# Altium PCB msr50.PcbDoc (part 2 of 8)
Units mil, origin at the board's own origin, x right, y up, seen from the top; angles counter-clockwise.
Board outline 3925 x 3925 mil, 2 copper layers (TopLayer, BottomLayer); 109 components, 122 nets, 846 pads, 52 vias.
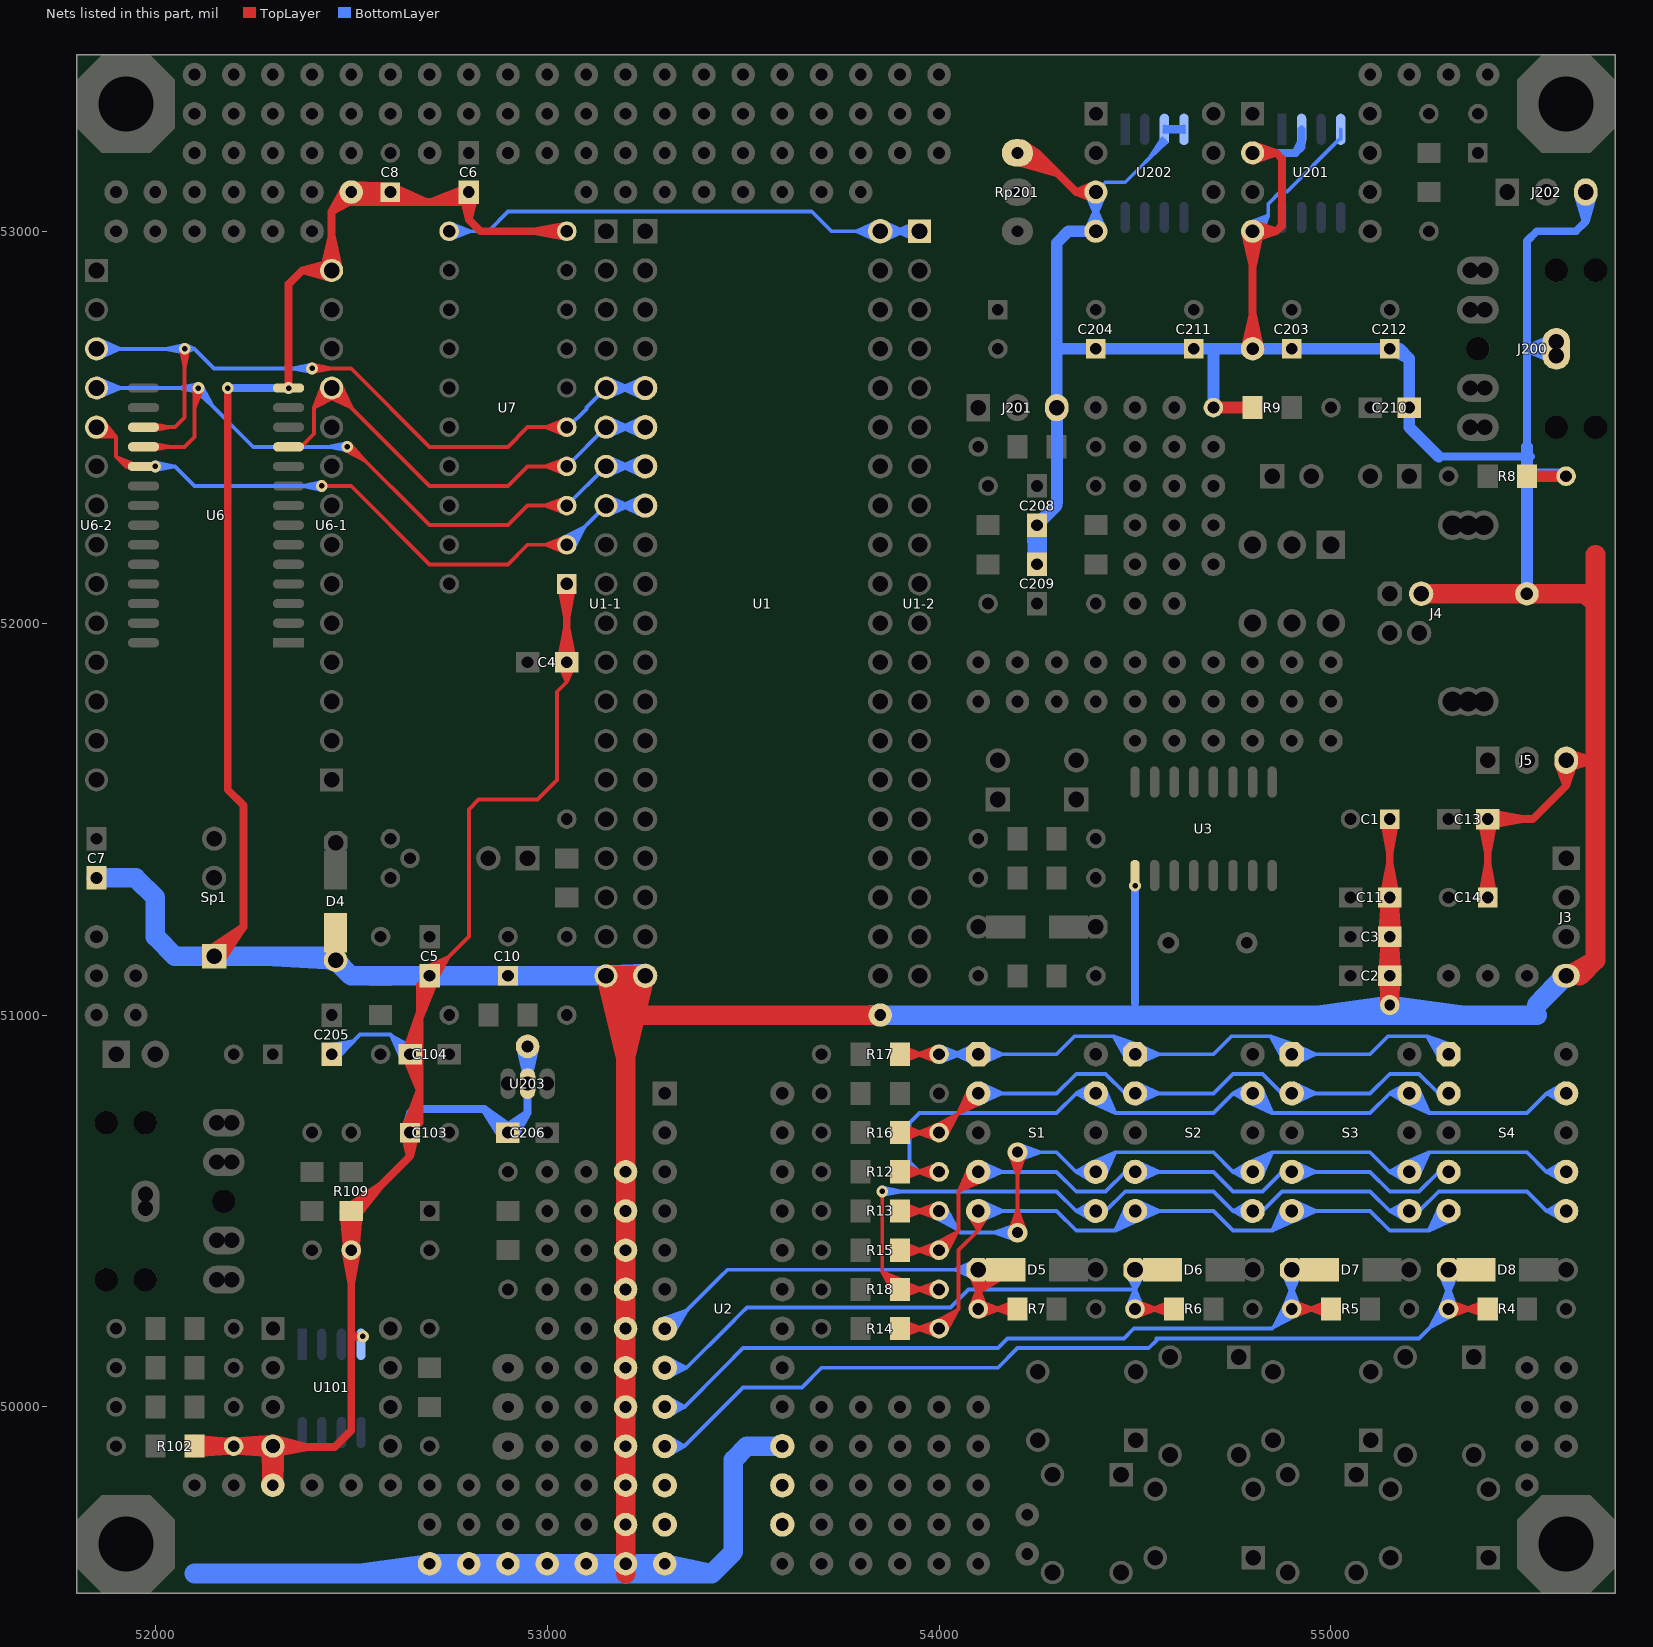
[diagram p2: the nets of this part, all layers, seen from the top]

## Via types
v1: diameter 30, hole 14, TopLayer to BottomLayer, 40 vias
v2: diameter 50, hole 28, TopLayer to BottomLayer, 12 vias

## Nets (pads, with @x,y where several pads share a name; then routed paths per layer and width w, separated by ;. In a path a pad name is that pad's centre, name@x,y a point inside that pad or via, vN(x,y) a via of type N, cw(c..) or ccw(c..) an arc to the next point about the centre after c; other vN are vias at no path point) (continued)
AD4: U1-1.5 U1.5 U6-2.3 U6.17 U7.5 | length 3585.7
  TopLayer w10: U6.17@51969.92,52500 52050,52500 52075,52525 v1(52075,52700) ; U6.17@51998.11,52500 52039.92,52500 ; U6.17@51998.67,52493.21 52039.92,52500 ; U6.17@51998.67,52506.79 52039.92,52500 ; v1@52065.05,52698.98 52075,52651 v1@52084.95,52698.98 ; v1@52395,52650 52500,52650 52700,52450 52900,52450 52950,52500 U7.5@53050,52500 ; v1(52400,52650) 52449,52650 ; v1@52401.02,52640.05 52449,52650 ; v1@52401.02,52659.95 52449,52650 ; U7.5@53046.36,52480.33 52995,52500 ; U7.5@53046.36,52519.67 52995,52500 ; U7.5@53049.09,52490.04 52995,52500 ; U7.5@53049.09,52509.96 52995,52500
  BottomLayer w10: U6-2.3@51850,52700 52100,52700 ; U6-2.3@51851.77,52685.58 51909.53,52700 ; U6-2.3@51851.77,52714.42 51909.53,52700 ; U6-2.3@51855.05,52676 51909.53,52700 ; U6-2.3@51855.05,52724 51909.53,52700 ; v1@52073.98,52690.05 52026,52700 v1@52073.98,52709.95 ; v1@52077,52690.2 52100,52700 ; v1@52077,52709.8 52100,52700 ; v1@52395,52650 52150,52650 52100,52700 ; v1@52398.98,52640.05 52351,52650 ; v1@52398.98,52659.95 52351,52650 ; v1(52400,52650) 52351,52650 ; U7.5@53050,52500 53053.28,52500 53100,52546.72 53100,52550 U1-1.5@53150,52600 U1.5@53250,52600 ; U1-1.5@53151.77,52585.58 53209.53,52600 ; U1-1.5@53151.77,52614.42 53209.53,52600 ; U1-1.5@53155.05,52576 53209.53,52600 ; U1-1.5@53155.05,52624 53209.53,52600 ; U1.5@53244.46,52574.6 53189,52600 ; U1.5@53244.46,52625.4 53189,52600 ; U1.5@53247.9,52584.14 53189,52600 ; U1.5@53247.9,52615.86 53189,52600 ; U1.5@53249.7,52594.01 53189,52600 ; U1.5@53249.7,52605.99 53189,52600
AD5: U1-1.6 U1.6 U6-1.11 U6.11 U7.4 | length 2627.3
  TopLayer w10: U6.11@52340,52450 52371.72,52450 52405,52483.28 52405,52550 ; U6-1.11@52429.08,52612.81 52405,52550 ; U6-1.11@52435.88,52579.95 52500.74,52549.26 ; U6-1.11@52438.22,52608.5 52405,52550 ; U6-1.11@52440.82,52588.74 52500.74,52549.26 ; U6-1.11@52459.69,52589.17 52405,52550 ; U6-1.11@52461.26,52609.18 52500.74,52549.26 ; U6-1.11@52464.93,52580.54 52405,52550 ; U6-1.11@52470.05,52614.12 52500.74,52549.26 ; U7.4@53046.36,52380.33 52995,52400 ; U7.4@53046.36,52419.67 52995,52400 ; U7.4@53049.09,52390.04 52995,52400 ; U7.4@53049.09,52409.96 52995,52400 ; U7.4@53050,52400 52950,52400 52900,52350 52700,52350 U6-1.11@52450,52600 ; 52405,52550 U6-1.11@52450,52600 ; 52405,52550 52450,52595 U6-1.11@52450,52600
  BottomLayer w10: U7.4@53050,52400 U1-1.6@53150,52500 U1.6@53250,52500 ; U1-1.6@53151.77,52485.58 53209.53,52500 ; U1-1.6@53151.77,52514.42 53209.53,52500 ; U1-1.6@53155.05,52476 53209.53,52500 ; U1-1.6@53155.05,52524 53209.53,52500 ; U1.6@53244.46,52474.6 53189,52500 ; U1.6@53244.46,52525.4 53189,52500 ; U1.6@53247.9,52484.14 53189,52500 ; U1.6@53247.9,52515.86 53189,52500 ; U1.6@53249.7,52494.01 53189,52500 ; U1.6@53249.7,52505.99 53189,52500
AD6: U1-1.7 U1.7 U6-2.4 U6.18 U7.3 | length 3808.6
  TopLayer w10: U6.18@51969.92,52450 52075,52450 52100,52475 v1@52100,52605 ; U6.18@51998.11,52450 52039.92,52450 ; U6.18@51998.67,52443.21 52039.92,52450 ; U6.18@51998.67,52456.79 52039.92,52450 ; v1@52100.05,52600.98 52100,52549.55 ; v1(52110,52600) 52100,52549.55 ; v1@52119.57,52597.11 52100,52549.55 ; v1@52484.55,52441.61 52535.5,52414.5 ; v1@52496.81,52457.32 52535.5,52414.5 ; U7.3@53046.36,52280.33 52995,52300 ; U7.3@53046.36,52319.67 52995,52300 ; U7.3@53049.09,52290.04 52995,52300 ; U7.3@53049.09,52309.96 52995,52300 ; U7.3@53050,52300 52950,52300 52900,52250 52700,52250 52500,52450 v1(52490,52450) 52535.5,52414.5
  BottomLayer w10: U6-2.4@51850,52600 52100,52600 52250,52450 v1(52490,52450) ; U6-2.4@51851.77,52585.58 51909.53,52600 ; U6-2.4@51851.77,52614.42 51909.53,52600 ; U6-2.4@51855.05,52576 51909.53,52600 ; U6-2.4@51855.05,52624 51909.53,52600 ; v1@52102.68,52593.19 52144.98,52555.02 ; v1@52108.98,52590.05 52061,52600 ; v1@52108.98,52609.95 52061,52600 ; v1@52118.4,52605.42 52144.98,52555.02 ; v1@52488.98,52440.05 52441,52450 v1@52488.98,52459.95 ; U7.3@53050,52300 U1-1.7@53150,52400 U1.7@53250,52400 ; U1-1.7@53151.77,52385.58 53209.53,52400 ; U1-1.7@53151.77,52414.42 53209.53,52400 ; U1-1.7@53155.05,52376 53209.53,52400 ; U1-1.7@53155.05,52424 53209.53,52400 ; U1.7@53244.46,52374.6 53189,52400 ; U1.7@53244.46,52425.4 53189,52400 ; U1.7@53247.9,52384.14 53189,52400 ; U1.7@53247.9,52415.86 53189,52400 ; U1.7@53249.7,52394.01 53189,52400 ; U1.7@53249.7,52405.99 53189,52400 ; 52061,52600 v1(52110,52600) 52144.98,52555.02
AD7: U1-1.8 U1.8 U6-2.5 U6.19 U7.2 | length 3453.3
  TopLayer w10: U6-2.5@51844.11,52476.19 51900,52475 ; U6-2.5@51845.25,52486.27 51900,52475 ; U6-2.5@51858.13,52512.04 51900,52475 ; U6-2.5@51865.51,52519 51900,52475 ; U6.19@51937.9,52394.37 51902.29,52422.71 ; U6.19@51944.68,52406.14 51902.29,52422.71 ; U6.19@51969.92,52400 51925,52400 ; v1(52425,52350) 52500,52350 52700,52150 52900,52150 52950,52200 U7.2@53050,52200 ; U7.2@53046.36,52180.33 52995,52200 ; U7.2@53046.36,52219.67 52995,52200 ; U7.2@53049.09,52190.04 52995,52200 ; U7.2@53049.09,52209.96 52995,52200 ; 51900,52475 U6-2.5@51850,52500 51875,52500 51900,52475 ; 51900,52475 51900,52425 51925,52400 ; 51902.29,52422.71 U6.19@51941.73,52400 ; 51925,52400 U6.19@51941.73,52400 ; 51925,52400 51940.35,52406.67 51925,52400 ; 51925,52400 51940.35,52393.33 51925,52400 ; 51925,52400 U6.19@51941.73,52400
  BottomLayer w10: v1(52000,52400) 52050,52400 52100,52350 v1(52425,52350) 52376,52350 ; v1@52001.02,52390.05 52049,52400 v1@52001.02,52409.95 ; v1@52423.98,52340.05 52376,52350 ; v1@52423.98,52359.95 52376,52350 ; U7.2@53038.19,52216.14 53096.21,52246.21 ; U7.2@53043.49,52207.59 53096.21,52246.21 ; U7.2@53050,52200 U1-1.8@53150,52300 U1.8@53250,52300 ; U7.2@53057.59,52193.49 53096.21,52246.21 ; U7.2@53066.14,52188.19 53096.21,52246.21 ; U1-1.8@53151.77,52285.58 53209.53,52300 ; U1-1.8@53151.77,52314.42 53209.53,52300 ; U1-1.8@53155.05,52276 53209.53,52300 ; U1-1.8@53155.05,52324 53209.53,52300 ; U1.8@53244.46,52274.6 53189,52300 ; U1.8@53244.46,52325.4 53189,52300 ; U1.8@53247.9,52284.14 53189,52300 ; U1.8@53247.9,52315.86 53189,52300 ; U1.8@53249.7,52294.01 53189,52300 ; U1.8@53249.7,52305.99 53189,52300
ALE: U1-2.1 U1.40 U7.11 | length 2431.5
  BottomLayer w10: U7.11@52750,53000 52850,53000 52900,53050 53675,53050 53725,53000 U1.40@53850,53000 U1-2.1@53950,53000 ; U7.11@52750.91,52990.04 52805,53000 ; U7.11@52750.91,53009.96 52805,53000 ; U7.11@52753.64,52980.33 52805,53000 ; U7.11@52753.64,53019.67 52805,53000 ; U1.40@53844.46,52974.6 53789,53000 ; U1.40@53844.46,53025.4 53789,53000 ; U1.40@53847.9,52984.14 53789,53000 ; U1.40@53847.9,53015.86 53789,53000 ; U1.40@53849.7,52994.01 53789,53000 ; U1.40@53849.7,53005.99 53789,53000 ; U1.40@53850.3,52994.01 53911,53000 ; U1.40@53850.3,53005.99 53911,53000 ; U1.40@53852.1,52984.14 53911,53000 ; U1.40@53852.1,53015.86 53911,53000 ; U1.40@53855.54,52974.6 53911,53000 ; U1.40@53855.54,53025.4 53911,53000 ; U1-2.1@53944.95,52976 53890.47,53000 ; U1-2.1@53944.95,53024 53890.47,53000 ; U1-2.1@53948.23,52985.58 53890.47,53000 ; U1-2.1@53948.23,53014.42 53890.47,53000
B: R12.1 R12.3 S1.9 S2.9 S3.9 S4.9 | length 5851.6
  TopLayer w10: R12.3@53900,50600 R12.1@54000,50600 ; R12.3@53901.01,50589.46 53955.59,50600 ; R12.3@53901.01,50610.54 53955.59,50600 ; R12.3@53903.81,50579.77 53955.59,50600 ; R12.3@53903.81,50620.23 53955.59,50600 ; R12.1@53996.36,50580.33 53945,50600 ; R12.1@53996.36,50619.67 53945,50600 ; R12.1@53999.09,50590.04 53945,50600 ; R12.1@53999.09,50609.96 53945,50600
  BottomLayer w10: R12.1@53996,50580.4 53950,50600 ; R12.1@53996,50619.6 53950,50600 ; R12.1@53999,50590.05 53950,50600 ; R12.1@53999,50609.95 53950,50600 ; R12.1@54000,50600 53950,50600 ; S1.9@54385.31,50778.55 54450,50750 ; S1.9@54390.04,50787.48 54450,50750 ; S1.9@54393.24,50774.89 54350,50800 ; S1.9@54393.24,50825.11 54350,50800 ; S1.9@54395.94,50795.58 54450,50750 ; S1.9@54397.44,50784.21 54350,50800 ; S1.9@54397.44,50815.79 54350,50800 ; S1.9@54399.64,50794.01 54350,50800 ; S1.9@54399.64,50805.99 54350,50800 ; S1.9@54404.42,50804.06 54450,50750 ; S1.9@54412.52,50809.96 54450,50750 ; S1.9@54421.45,50814.69 54450,50750 ; S2.9@54785.31,50778.55 54850,50750 ; S2.9@54790.04,50787.48 54850,50750 ; S2.9@54793.24,50774.89 54750,50800 ; S2.9@54793.24,50825.11 54750,50800 ; S2.9@54795.94,50795.58 54850,50750 ; S2.9@54797.44,50784.21 54750,50800 ; S2.9@54797.44,50815.79 54750,50800 ; S2.9@54799.64,50794.01 54750,50800 ; S2.9@54799.64,50805.99 54750,50800 ; S2.9@54804.42,50804.06 54850,50750 ; S2.9@54812.52,50809.96 54850,50750 ; S2.9@54821.45,50814.69 54850,50750 ; S3.9@55185.31,50778.55 55250,50750 ; S3.9@55190.04,50787.48 55250,50750 ; S3.9@55195.94,50795.58 55250,50750 ; S3.9@55204.42,50804.06 55250,50750 ; S3.9@55212.52,50809.96 55250,50750 ; S3.9@55221.45,50814.69 55250,50750 ; S4.9@55593.24,50774.89 55550,50800 ; S4.9@55593.24,50825.11 55550,50800 ; S4.9@55597.44,50784.21 55550,50800 ; S4.9@55597.44,50815.79 55550,50800 ; S4.9@55599.64,50794.01 55550,50800 ; S4.9@55599.64,50805.99 55550,50800 ; S4.9@55600,50800 55550,50800 ; 53950,50600 53925,50625 53925,50725 53950,50750 54300,50750 54350,50800 ; 54350,50800 S1.9@54400,50800 ; 54350,50800 S1.9@54400,50800 ; S1.9@54400,50800 54450,50750 ; 54450,50750 54700,50750 54750,50800 ; 54750,50800 S2.9@54800,50800 ; 54750,50800 S2.9@54800,50800 ; S2.9@54800,50800 54850,50750 ; 54850,50750 55100,50750 ; 55100,50750 55150,50800 ; 55100,50750 55150,50800 ; 55150,50800 S3.9@55200,50800 ; 55150,50800 55199.64,50805.99 55150,50800 ; 55150,50800 55199.64,50794.01 55150,50800 ; 55150,50800 55197.44,50815.79 55150,50800 ; 55150,50800 55197.44,50784.21 55150,50800 ; 55150,50800 55193.24,50825.11 55150,50800 ; 55150,50800 55193.24,50774.89 55150,50800 ; 55150,50800 S3.9@55200,50800 ; 55150,50800 S3.9@55200,50800 ; 55150,50800 S3.9@55200,50800 ; S3.9@55200,50800 55250,50750 ; 55250,50750 55500,50750 55550,50800
C: R13.1 R13.3 S1.7 S2.7 S3.7 S4.7 | length 6814
  TopLayer w10: R13.3@53900,50500 R13.1@54000,50500 ; R13.3@53901.01,50489.46 53955.59,50500 ; R13.3@53901.01,50510.54 53955.59,50500 ; R13.3@53903.81,50479.77 53955.59,50500 ; R13.3@53903.81,50520.23 53955.59,50500 ; R13.1@53996.36,50480.33 53945,50500 ; R13.1@53996.36,50519.67 53945,50500 ; R13.1@53999.09,50490.04 53945,50500 ; R13.1@53999.09,50509.96 53945,50500 ; v2@54180.29,50448.39 54200,50504 ; v2@54180.29,50646.61 54200,50591 ; v2@54190.04,50445.85 54200,50504 ; v2@54190.04,50649.15 54200,50591 ; v2(54200,50445) v2(54200,50650) ; v2@54209.96,50445.85 54200,50504 ; v2@54209.96,50649.15 54200,50591 ; v2@54219.71,50448.39 54200,50504 ; v2@54219.71,50646.61 54200,50591
  BottomLayer w10: R13.1@53988.19,50483.86 54046.21,50453.79 ; R13.1@53993.49,50492.41 54046.21,50453.79 ; R13.1@54000,50500 54055,50445 v2(54200,50445) ; R13.1@54007.59,50506.51 54046.21,50453.79 ; R13.1@54016.14,50511.81 54046.21,50453.79 ; v2@54196.61,50425.29 54141,50445 ; v2@54196.61,50464.71 54141,50445 ; v2@54199.15,50435.04 54141,50445 ; v2@54199.15,50454.96 54141,50445 ; v2(54200,50650) 54300,50650 54350,50600 ; v2@54200.85,50640.04 54259,50650 ; v2@54200.85,50659.96 54259,50650 ; v2@54203.39,50630.29 54259,50650 ; v2@54203.39,50669.71 54259,50650 ; S1.7@54385.31,50621.45 54450,50650 ; S1.7@54390.04,50612.52 54450,50650 ; S1.7@54393.24,50574.89 54350,50600 ; S1.7@54393.24,50625.11 54350,50600 ; S1.7@54395.94,50604.42 54450,50650 ; S1.7@54397.44,50584.21 54350,50600 ; S1.7@54397.44,50615.79 54350,50600 ; S1.7@54399.64,50594.01 54350,50600 ; S1.7@54399.64,50605.99 54350,50600 ; S1.7@54404.42,50595.94 54450,50650 ; S1.7@54412.52,50590.04 54450,50650 ; S1.7@54421.45,50585.31 54450,50650 ; S2.7@54785.31,50621.45 54850,50650 ; S2.7@54790.04,50612.52 54850,50650 ; S2.7@54793.24,50574.89 54750,50600 ; S2.7@54793.24,50625.11 54750,50600 ; S2.7@54795.94,50604.42 54850,50650 ; S2.7@54797.44,50584.21 54750,50600 ; S2.7@54797.44,50615.79 54750,50600 ; S2.7@54799.64,50594.01 54750,50600 ; S2.7@54799.64,50605.99 54750,50600 ; S2.7@54804.42,50595.94 54850,50650 ; S2.7@54812.52,50590.04 54850,50650 ; S2.7@54821.45,50585.31 54850,50650 ; S3.7@55185.31,50621.45 55250,50650 ; S3.7@55190.04,50612.52 55250,50650 ; S3.7@55195.94,50604.42 55250,50650 ; S3.7@55204.42,50595.94 55250,50650 ; S3.7@55212.52,50590.04 55250,50650 ; S3.7@55221.45,50585.31 55250,50650 ; S4.7@55593.24,50574.89 55550,50600 ; S4.7@55593.24,50625.11 55550,50600 ; S4.7@55597.44,50584.21 55550,50600 ; S4.7@55597.44,50615.79 55550,50600 ; S4.7@55599.64,50594.01 55550,50600 ; S4.7@55599.64,50605.99 55550,50600 ; S4.7@55600,50600 55550,50600 ; 54350,50600 S1.7@54400,50600 ; 54350,50600 S1.7@54400,50600 ; S1.7@54400,50600 54450,50650 ; 54450,50650 54700,50650 54750,50600 ; 54750,50600 S2.7@54800,50600 ; 54750,50600 S2.7@54800,50600 ; S2.7@54800,50600 54850,50650 ; 54850,50650 55100,50650 ; 55100,50650 55150,50600 ; 55100,50650 55150,50600 ; 55150,50600 S3.7@55200,50600 ; 55150,50600 55199.64,50605.99 55150,50600 ; 55150,50600 55199.64,50594.01 55150,50600 ; 55150,50600 55197.44,50615.79 55150,50600 ; 55150,50600 55197.44,50584.21 55150,50600 ; 55150,50600 55193.24,50625.11 55150,50600 ; 55150,50600 55193.24,50574.89 55150,50600 ; 55150,50600 S3.7@55200,50600 ; 55150,50600 S3.7@55200,50600 ; 55150,50600 S3.7@55200,50600 ; S3.7@55200,50600 55250,50650 ; 55250,50650 55500,50650 55550,50600
D: R14.1 R14.3 S1.5 S2.5 S3.5 S4.5 | length 5352.4
  TopLayer w10: R14.3@53900,50200 R14.1@54000,50200 54050,50250 54050,50400 54100,50450 ; R14.3@53901.01,50189.46 53955.59,50200 ; R14.3@53901.01,50210.54 53955.59,50200 ; R14.3@53903.81,50179.77 53955.59,50200 ; R14.3@53903.81,50220.23 53955.59,50200 ; R14.1@53988.19,50216.14 54046.21,50246.21 ; R14.1@53993.49,50207.59 54046.21,50246.21 ; R14.1@53996.36,50180.33 53945,50200 ; R14.1@53996.36,50219.67 53945,50200 ; R14.1@53999.09,50190.04 53945,50200 ; R14.1@53999.09,50209.96 53945,50200 ; R14.1@54007.59,50193.49 54046.21,50246.21 ; R14.1@54016.14,50188.19 54046.21,50246.21 ; S1.5@54074.89,50493.24 54100,50450 ; S1.5@54084.21,50497.44 54100,50450 ; S1.5@54094.01,50499.64 54100,50450 ; S1.5@54100,50500 54100,50450 ; S1.5@54105.99,50499.64 54100,50450 ; S1.5@54115.79,50497.44 54100,50450 ; S1.5@54125.11,50493.24 54100,50450
  BottomLayer w10: S1.5@54100,50500 54300,50500 54350,50450 54450,50450 ; S1.5@54100.3,50494.01 54161,50500 ; S1.5@54100.3,50505.99 54161,50500 ; S1.5@54102.1,50484.14 54161,50500 ; S1.5@54102.1,50515.86 54161,50500 ; S1.5@54105.54,50474.6 54161,50500 ; S1.5@54105.54,50525.4 54161,50500 ; S2.5@54478.55,50514.69 54450,50450 ; S2.5@54487.48,50509.96 54450,50450 ; S2.5@54495.58,50504.06 54450,50450 ; S2.5@54500.3,50494.01 54561,50500 ; S2.5@54500.3,50505.99 54561,50500 ; S2.5@54502.1,50484.14 54561,50500 ; S2.5@54502.1,50515.86 54561,50500 ; S2.5@54504.06,50495.58 54450,50450 ; S2.5@54505.54,50474.6 54561,50500 ; S2.5@54505.54,50525.4 54561,50500 ; S2.5@54509.96,50487.48 54450,50450 ; S2.5@54514.69,50478.55 54450,50450 ; S3.5@54878.55,50514.69 54850,50450 ; S3.5@54887.48,50509.96 54850,50450 ; S3.5@54895.58,50504.06 54850,50450 ; S3.5@54900.3,50494.01 54961,50500 ; S3.5@54900.3,50505.99 54961,50500 ; S3.5@54902.1,50484.14 54961,50500 ; S3.5@54902.1,50515.86 54961,50500 ; S3.5@54904.06,50495.58 54850,50450 ; S3.5@54905.54,50474.6 54961,50500 ; S3.5@54905.54,50525.4 54961,50500 ; S3.5@54909.96,50487.48 54850,50450 ; S3.5@54914.69,50478.55 54850,50450 ; S4.5@55278.55,50514.69 55250,50450 ; S4.5@55287.48,50509.96 55250,50450 ; S4.5@55295.58,50504.06 55250,50450 ; S4.5@55304.06,50495.58 55250,50450 ; S4.5@55309.96,50487.48 55250,50450 ; S4.5@55314.69,50478.55 55250,50450 ; 54450,50450 S2.5@54500,50500 ; 54450,50450 S2.5@54500,50500 ; S2.5@54500,50500 54700,50500 54750,50450 54850,50450 ; 54850,50450 S3.5@54900,50500 ; 54850,50450 S3.5@54900,50500 ; S3.5@54900,50500 55100,50500 55150,50450 55250,50450 ; 55250,50450 S4.5@55300,50500 55250,50450
DIG0: U2.14
DIG1: U2.13
DIG2: U2.12
DIG3: U2.11
DIG4: D8.1 D8.3 R4.2 R4.4 U2.10 | length 3811.7
  TopLayer w10: R4.2@55300,50250 R4.4@55400,50250 ; R4.2@55300.91,50240.04 55355,50250 ; R4.2@55300.91,50259.96 55355,50250 ; R4.2@55303.64,50230.33 55355,50250 ; R4.2@55303.64,50269.67 55355,50250 ; R4.4@55396.19,50229.77 55344.41,50250 ; R4.4@55396.19,50270.23 55344.41,50250 ; R4.4@55398.99,50239.46 55344.41,50250 ; R4.4@55398.99,50260.54 55344.41,50250
  BottomLayer w10: U2.10@53300,49900 53350,49900 ; U2.10@53300.36,49894.01 53350,49900 ; U2.10@53300.36,49905.99 53350,49900 ; U2.10@53302.56,49884.21 53350,49900 ; U2.10@53302.56,49915.79 53350,49900 ; U2.10@53306.76,49874.89 53350,49900 ; U2.10@53306.76,49925.11 53350,49900 ; D8.1@55275.55,50344.79 55300,50290 ; R4.2@55280.33,50253.64 55300,50305 ; R4.2@55283.86,50261.81 55253.79,50203.79 ; D8.1@55285.12,50348.12 55300,50290 ; R4.2@55290.04,50250.91 55300,50305 ; R4.2@55292.41,50256.51 55253.79,50203.79 ; D8.1@55300,50350 R4.2@55300,50250 55225,50175 54555,50175 54555,50170 54535,50150 54200,50150 54150,50100 53700,50100 53650,50050 53500,50050 53350,49900 ; R4.2@55306.51,50242.41 55253.79,50203.79 ; R4.2@55309.96,50250.91 55300,50305 ; R4.2@55311.81,50233.86 55253.79,50203.79 ; D8.1@55314.88,50348.12 55300,50290 ; R4.2@55319.67,50253.64 55300,50305 ; D8.1@55324.45,50344.79 55300,50290
DIG5: D7.1 D7.3 R5.2 R5.4 U2.9 | length 3367.3
  TopLayer w10: R5.2@54900,50250 R5.4@55000,50250 ; R5.2@54900.91,50240.04 54955,50250 ; R5.2@54900.91,50259.96 54955,50250 ; R5.2@54903.64,50230.33 54955,50250 ; R5.2@54903.64,50269.67 54955,50250 ; R5.4@54996.19,50229.77 54944.41,50250 ; R5.4@54996.19,50270.23 54944.41,50250 ; R5.4@54998.99,50239.46 54944.41,50250 ; R5.4@54998.99,50260.54 54944.41,50250
  BottomLayer w10: U2.9@53300,50000 53350,50000 ; U2.9@53300.36,49994.01 53350,50000 ; U2.9@53300.36,50005.99 53350,50000 ; U2.9@53302.56,49984.21 53350,50000 ; U2.9@53302.56,50015.79 53350,50000 ; U2.9@53306.76,49974.89 53350,50000 ; U2.9@53306.76,50025.11 53350,50000 ; D7.1@54875.55,50344.79 54900,50290 ; R5.2@54880.33,50253.64 54900,50305 ; R5.2@54883.86,50261.81 54853.79,50203.79 ; D7.1@54885.12,50348.12 54900,50290 ; R5.2@54890.04,50250.91 54900,50305 ; R5.2@54892.41,50256.51 54853.79,50203.79 ; D7.1@54900,50350 R5.2@54900,50250 54850,50200 54496.72,50200 54471.72,50175 54175,50175 54150,50150 53725,50150 53500,50150 53450,50100 53350,50000 ; R5.2@54906.51,50242.41 54853.79,50203.79 ; R5.2@54909.96,50250.91 54900,50305 ; R5.2@54911.81,50233.86 54853.79,50203.79 ; D7.1@54914.88,50348.12 54900,50290 ; R5.2@54919.67,50253.64 54900,50305 ; D7.1@54924.45,50344.79 54900,50290
DIG6: D6.1 D6.3 R6.2 R6.4 U2.8 | length 2661.2
  TopLayer w10: R6.2@54500,50250 R6.4@54600,50250 ; R6.2@54500.91,50240.04 54555,50250 ; R6.2@54500.91,50259.96 54555,50250 ; R6.2@54503.64,50230.33 54555,50250 ; R6.2@54503.64,50269.67 54555,50250 ; R6.4@54596.19,50229.77 54544.41,50250 ; R6.4@54596.19,50270.23 54544.41,50250 ; R6.4@54598.99,50239.46 54544.41,50250 ; R6.4@54598.99,50260.54 54544.41,50250
  BottomLayer w10: U2.8@53300,50100 53356,50100 ; U2.8@53300.32,50094.01 53356,50100 ; U2.8@53300.32,50105.99 53356,50100 ; U2.8@53302.29,50084.16 53356,50100 ; U2.8@53302.29,50115.84 53356,50100 ; U2.8@53306.04,50074.71 53356,50100 ; U2.8@53306.04,50125.29 53356,50100 ; D6.1@54475.79,50343.75 54500,50300 ; R6.2@54480.4,50254 54500,50300 ; D6.1@54485.17,50347.75 54500,50300 ; R6.2@54490.05,50251 54500,50300 ; R6.2@54500,50250 54500,50300 ; D6.1@54500,50350 54500,50300 ; R6.2@54509.95,50251 54500,50300 ; D6.1@54514.83,50347.75 54500,50300 ; R6.2@54519.6,50254 54500,50300 ; D6.1@54524.21,50343.75 54500,50300 ; 53356,50100 53465,50209 53495,50239 53510,50254 53580.95,50254 54029,50254 54075,50300 54500,50300
DIG7: D5.1 D5.3 R7.2 R7.4 U2.7 | length 3103.2
  TopLayer w10: D5.1@54075.55,50344.79 54100,50290 ; R7.2@54080.33,50253.64 54100,50305 ; D5.1@54085.12,50348.12 54100,50290 ; R7.2@54090.04,50250.91 54100,50305 ; D5.1@54100,50350 R7.2@54100,50250 R7.4@54200,50250 ; R7.2@54100.91,50240.04 54155,50250 ; R7.2@54100.91,50259.96 54155,50250 ; R7.2@54103.64,50230.33 54155,50250 ; R7.2@54103.64,50269.67 54155,50250 ; R7.2@54109.96,50250.91 54100,50305 ; D5.1@54114.88,50348.12 54100,50290 ; R7.2@54119.67,50253.64 54100,50305 ; D5.1@54124.45,50344.79 54100,50290 ; D5.1@54128.45,50362.54 54101.33,50292.98 ; D5.3@54137.57,50358.25 54101.33,50292.98 ; D5.3@54149.53,50350 54101.33,50292.98 ; D5.3@54159.66,50339.59 54101.33,50292.98 ; D5.3@54165.4,50331.3 54101.33,50292.98 ; R7.4@54196.19,50229.77 54144.41,50250 ; R7.4@54196.19,50270.23 54144.41,50250 ; R7.4@54198.99,50239.46 54144.41,50250 ; R7.4@54198.99,50260.54 54144.41,50250
  BottomLayer w10: U2.7@53287.32,50222.7 53356.41,50246.41 ; U2.7@53291.25,50213.39 53356.41,50246.41 ; U2.7@53296.38,50204.79 53356.41,50246.41 ; U2.7@53304,50195.53 53356.41,50246.41 ; U2.7@53311.46,50188.83 53356.41,50246.41 ; U2.7@53319.83,50183.18 53356.41,50246.41 ; D5.1@54090,50360 D5.1@54100,50350 53460,50350 53440,50330 53310,50200 U2.7@53300,50200 53356.41,50246.41 ; D5.1@54094.79,50325.55 54040,50350 ; D5.1@54094.79,50374.45 54040,50350 ; D5.1@54098.12,50335.12 54040,50350 ; D5.1@54098.12,50364.88 54040,50350
DP: R18.1 R18.3 S1.6 S2.6 S3.6 S4.6 | length 4924.3
  TopLayer w10: v1(53855,50550) 53855,50345 ; R18.3@53883.75,50291.29 53855,50345 ; R18.3@53892.21,50296.76 53855,50345 ; R18.3@53900,50303.94 53855,50345 ; R18.3@53901.01,50289.46 53955.59,50300 ; R18.3@53901.01,50310.54 53955.59,50300 ; R18.3@53903.81,50279.77 53955.59,50300 ; R18.3@53903.81,50320.23 53955.59,50300 ; R18.3@53906.43,50312.35 53855,50345 ; R18.3@53911.11,50321.27 53855,50345 ; R18.1@53996.36,50280.33 53945,50300 ; R18.1@53996.36,50319.67 53945,50300 ; R18.1@53999.09,50290.04 53945,50300 ; R18.1@53999.09,50309.96 53945,50300 ; R18.1@54000,50300 R18.3@53900,50300 53875,50325 53855,50345
  BottomLayer w10: v1(53855,50550) 54300,50550 54350,50500 ; v1@53856.02,50540.05 53904,50550 v1@53856.02,50559.95 ; S1.6@54393.24,50474.89 54350,50500 ; S1.6@54393.24,50525.11 54350,50500 ; S1.6@54397.44,50484.21 54350,50500 ; S1.6@54397.44,50515.79 54350,50500 ; S1.6@54399.64,50494.01 54350,50500 ; S1.6@54399.64,50505.99 54350,50500 ; S2.6@54793.24,50474.89 54750,50500 ; S2.6@54793.24,50525.11 54750,50500 ; S2.6@54797.44,50484.21 54750,50500 ; S2.6@54797.44,50515.79 54750,50500 ; S2.6@54799.64,50494.01 54750,50500 ; S2.6@54799.64,50505.99 54750,50500 ; S4.6@55593.24,50474.89 55550,50500 ; S4.6@55593.24,50525.11 55550,50500 ; S4.6@55597.44,50484.21 55550,50500 ; S4.6@55597.44,50515.79 55550,50500 ; S4.6@55599.64,50494.01 55550,50500 ; S4.6@55599.64,50505.99 55550,50500 ; S4.6@55600,50500 55550,50500 ; 54350,50500 S1.6@54400,50500 ; 54350,50500 S1.6@54400,50500 ; S1.6@54400,50500 54425,50500 54475,50550 54700,50550 54750,50500 ; 54750,50500 S2.6@54800,50500 ; 54750,50500 S2.6@54800,50500 ; S2.6@54800,50500 54825,50500 54875,50550 55100,50550 ; 55100,50550 55150,50500 ; 55100,50550 55150,50500 ; 55150,50500 S3.6@55200,50500 ; 55150,50500 55199.64,50505.99 55150,50500 ; 55150,50500 55199.64,50494.01 55150,50500 ; 55150,50500 55197.44,50515.79 55150,50500 ; 55150,50500 55197.44,50484.21 55150,50500 ; 55150,50500 55193.24,50525.11 55150,50500 ; 55150,50500 55193.24,50474.89 55150,50500 ; 55150,50500 S3.6@55200,50500 ; 55150,50500 S3.6@55200,50500 ; 55150,50500 S3.6@55200,50500 ; S3.6@55200,50500 55225,50500 55275,50550 55500,50550 55550,50500
E: R15.1 R15.3 S1.4 S2.4 S3.4 S4.4 | length 3887.4
  TopLayer w10: R15.3@53900,50400 R15.1@54000,50400 54050,50450 54050,50550 ; R15.3@53901.01,50389.46 53955.59,50400 ; R15.3@53901.01,50410.54 53955.59,50400 ; R15.3@53903.81,50379.77 53955.59,50400 ; R15.3@53903.81,50420.23 53955.59,50400 ; R15.1@53988.19,50416.14 54046.21,50446.21 ; R15.1@53993.49,50407.59 54046.21,50446.21 ; R15.1@53996.36,50380.33 53945,50400 ; R15.1@53996.36,50419.67 53945,50400 ; R15.1@53999.09,50390.04 53945,50400 ; R15.1@53999.09,50409.96 53945,50400 ; R15.1@54007.59,50393.49 54046.21,50446.21 ; R15.1@54016.14,50388.19 54046.21,50446.21 ; S1.4@54078.55,50614.69 54050,50550 ; S1.4@54087.48,50609.96 54050,50550 ; S1.4@54095.58,50604.06 54050,50550 ; S1.4@54104.06,50595.58 54050,50550 ; S1.4@54109.96,50587.48 54050,50550 ; S1.4@54114.69,50578.55 54050,50550 ; 54050,50550 S1.4@54100,50600 54050,50550
  BottomLayer w10: S1.4@54100,50600 54300,50600 54350,50550 54425,50550 S2.4@54475,50600 ; S1.4@54100.3,50594.01 54161,50600 ; S1.4@54100.3,50605.99 54161,50600 ; S1.4@54102.1,50584.14 54161,50600 ; S1.4@54102.1,50615.86 54161,50600 ; S1.4@54105.54,50574.6 54161,50600 ; S1.4@54105.54,50625.4 54161,50600 ; S2.4@54500,50600 54700,50600 54750,50550 54825,50550 S3.4@54875,50600 ; S2.4@54500.3,50594.01 54561,50600 ; S2.4@54500.3,50605.99 54561,50600 ; S2.4@54502.1,50584.14 54561,50600 ; S2.4@54502.1,50615.86 54561,50600 ; S2.4@54505.54,50574.6 54561,50600 ; S2.4@54505.54,50625.4 54561,50600 ; S3.4@54900,50600 55100,50600 55150,50550 55225,50550 S4.4@55275,50600 ; S3.4@54900.3,50594.01 54961,50600 ; S3.4@54900.3,50605.99 54961,50600 ; S3.4@54902.1,50584.14 54961,50600 ; S3.4@54902.1,50615.86 54961,50600 ; S3.4@54905.54,50574.6 54961,50600 ; S3.4@54905.54,50625.4 54961,50600
F: R16.1 R16.3 S1.2 S2.2 S3.2 S4.2 | length 3909.4
  TopLayer w10: R16.3@53900,50700 R16.1@54000,50700 S1.2@54100,50800 54047.79,50747.79 ; R16.3@53901.01,50689.46 53955.59,50700 ; R16.3@53901.01,50710.54 53955.59,50700 ; R16.3@53903.81,50679.77 53955.59,50700 ; R16.3@53903.81,50720.23 53955.59,50700 ; R16.1@53988.19,50716.14 54046.21,50746.21 ; R16.1@53993.49,50707.59 54046.21,50746.21 ; R16.1@53996.36,50680.33 53945,50700 ; R16.1@53996.36,50719.67 53945,50700 ; R16.1@53999.09,50690.04 53945,50700 ; R16.1@53999.09,50709.96 53945,50700 ; R16.1@54007.59,50693.49 54046.21,50746.21 ; R16.1@54016.14,50688.19 54046.21,50746.21 ; S1.2@54078.67,50814.86 54047.79,50747.79 ; S1.2@54087.53,50810.02 54047.79,50747.79 ; S1.2@54095.59,50804.07 54047.79,50747.79 ; S1.2@54104.07,50795.59 54047.79,50747.79 ; S1.2@54110.02,50787.53 54047.79,50747.79 ; S1.2@54114.86,50778.67 54047.79,50747.79
  BottomLayer w10: S1.2@54075,50800 S1.2@54100,50800 54300,50800 54350,50850 54425,50850 54475,50800 S2.2@54500,50800 54700,50800 54750,50850 54825,50850 54875,50800 S3.2@54900,50800 55100,50800 55150,50850 55225,50850 55275,50800 S4.2@55300,50800 ; S1.2@54100.3,50794.01 54161,50800 ; S1.2@54100.3,50805.99 54161,50800 ; S1.2@54102.1,50784.14 54161,50800 ; S1.2@54102.1,50815.86 54161,50800 ; S1.2@54105.54,50774.6 54161,50800 ; S1.2@54105.54,50825.4 54161,50800 ; S2.2@54500.3,50794.01 54561,50800 ; S2.2@54500.3,50805.99 54561,50800 ; S2.2@54502.1,50784.14 54561,50800 ; S2.2@54502.1,50815.86 54561,50800 ; S2.2@54505.54,50774.6 54561,50800 ; S2.2@54505.54,50825.4 54561,50800 ; S3.2@54900.3,50794.01 54961,50800 ; S3.2@54900.3,50805.99 54961,50800 ; S3.2@54902.1,50784.14 54961,50800 ; S3.2@54902.1,50815.86 54961,50800 ; S3.2@54905.54,50774.6 54961,50800 ; S3.2@54905.54,50825.4 54961,50800
G: R17.1 R17.3 S1.1 S2.1 S3.1 S4.1 | length 5145.6
  TopLayer w10: R17.3@53900,50900 R17.1@54000,50900 ; R17.3@53901.01,50889.46 53955.59,50900 ; R17.3@53901.01,50910.54 53955.59,50900 ; R17.3@53903.81,50879.77 53955.59,50900 ; R17.3@53903.81,50920.23 53955.59,50900 ; R17.1@53996.36,50880.33 53945,50900 ; R17.1@53996.36,50919.67 53945,50900 ; R17.1@53999.09,50890.04 53945,50900 ; R17.1@53999.09,50909.96 53945,50900
  BottomLayer w10: R17.1@54000,50900 S1.1@54100,50900 ; R17.1@54000.91,50890.04 54055,50900 ; R17.1@54000.91,50909.96 54055,50900 ; R17.1@54003.64,50880.33 54055,50900 ; R17.1@54003.64,50919.67 54055,50900 ; S1.1@54092,50900 S1.1@54100,50900 ; S1.1@54094.46,50874.6 54039,50900 ; S1.1@54094.46,50925.4 54039,50900 ; S1.1@54097.9,50884.14 54039,50900 ; S1.1@54097.9,50915.86 54039,50900 ; S1.1@54099.7,50894.01 54039,50900 ; S1.1@54099.7,50905.99 54039,50900 ; S1.1@54100.3,50894.01 54161,50900 ; S1.1@54100.3,50905.99 54161,50900 ; S1.1@54102.1,50884.14 54161,50900 ; S1.1@54102.1,50915.86 54161,50900 ; S1.1@54105.54,50874.6 54161,50900 ; S1.1@54105.54,50925.4 54161,50900 ; S2.1@54479.8,50883.63 54446.02,50945.98 ; S2.1@54488.32,50889.07 54446.02,50945.98 ; S2.1@54495.92,50895.6 54446.02,50945.98 ; S2.1@54500.3,50894.01 54561,50900 ; S2.1@54500.3,50905.99 54561,50900 ; S2.1@54502.1,50884.14 54561,50900 ; S2.1@54502.1,50915.86 54561,50900 ; S2.1@54503.69,50904.73 54446.02,50945.98 ; S2.1@54505.54,50874.6 54561,50900 ; S2.1@54505.54,50925.4 54561,50900 ; S2.1@54508.93,50913.27 54446.02,50945.98 ; S2.1@54512.94,50922.55 54446.02,50945.98 ; S3.1@54879.8,50883.63 54846.02,50945.98 ; S3.1@54888.32,50889.07 54846.02,50945.98 ; S3.1@54895.92,50895.6 54846.02,50945.98 ; S3.1@54900.3,50894.01 54961,50900 ; S3.1@54900.3,50905.99 54961,50900 ; S3.1@54902.1,50884.14 54961,50900 ; S3.1@54902.1,50915.86 54961,50900 ; S3.1@54903.69,50904.73 54846.02,50945.98 ; S3.1@54905.54,50874.6 54961,50900 ; S3.1@54905.54,50925.4 54961,50900 ; S3.1@54908.93,50913.27 54846.02,50945.98 ; S3.1@54912.94,50922.55 54846.02,50945.98 ; S4.1@55279.8,50883.63 55246.02,50945.98 ; S4.1@55288.32,50889.07 55246.02,50945.98 ; S4.1@55295.92,50895.6 55246.02,50945.98 ; S4.1@55303.69,50904.73 55246.02,50945.98 ; S4.1@55308.93,50913.27 55246.02,50945.98 ; S4.1@55312.94,50922.55 55246.02,50945.98 ; S1.1@54100,50900 54300,50900 54346,50946 54446,50946 ; 54446.02,50945.98 S2.1@54500,50900 ; 54446,50946 54492,50900 S2.1@54500,50900 ; S2.1@54500,50900 54700,50900 54746,50946 54750,50946 54846,50946 ; 54846.02,50945.98 S3.1@54900,50900 ; 54846,50946 S3.1@54892,50900 ; S3.1@54892,50900 S3.1@54900,50900 ; S3.1@54892,50900 S3.1@54900,50900 ; S3.1@54900,50900 55100,50900 55146,50946 55150,50946 55246,50946 ; 55246.02,50945.98 S4.1@55300,50900 55292,50900 55246,50946
GND: C1.1 C2.2 C3.2 C4.2 C5.2 C6.2 C7.2 C8.1 C10.1 C11.2 C13.2 C14.1 C103.1 C104.2 C203.1 C204.1 C205.2 C206.2 C208.2 C209.2 C210.2 C211.1 C212.1 D4.2 D4.4 J3.4 J4.4 J5.3 J200.1 J200.1A J200.1B J201.3 J202.3 pad.0@53200,50600 pad.0@53850,51000 pad.0@54800,52700 pad.0@55500,52075 pad.1@52950,50920 pad.1@53200,50500 pad.2@53200,49600 pad.2@53200,50400 pad.3@53200,50300 pad.4@53200,50200 pad.5@53200,50100 pad.6@53200,50000 pad.7@53200,49900 pad.8@53200,49800 pad.9@53200,49700 pad.10@53300,49600 pad.91 pad.155 pad.156 pad.157 pad.158 pad.159 pad.164 R8.1 R8.3 R9.1 R9.3 R102.2 R102.4 R109.1 R109.3 Rp201.1 Sp1.1 U1-1.20 U1.20 U2.15 U3.1 U6-1.14 U6.14 U7.1 U7.10 U101.4 U101.14 U201.2 U201.4 U201.12 U201.14 U202.3 U202.4 U202.13 U202.14 U203.2 | length 51856.6
  TopLayer w10: C5.2@52688.55,51121.61 52747.21,51147.21 ; C5.2@52693.3,51112.72 52747.21,51147.21 ; C5.2@52700,51100 52800,51200 52800,51525 52825,51550 52975,51550 53025,51600 53025,51825 53050,51850 ; C5.2@52700,51104 52747.21,51147.21 ; C5.2@52708.1,51096.55 52747.21,51147.21 ; C5.2@52716.53,51091.04 52747.21,51147.21 ; C4.2@53029.47,51895.59 53050,51850 ; C4.2@53039.07,51898.79 53050,51850 ; C4.2@53060.93,51898.79 53050,51850 ; C4.2@53070.53,51895.59 53050,51850 ; 53050,51850 C4.2@53050,51900 53050,51850
  TopLayer w20: R102.4@52099.85,49880.47 R102.2@52185.17,49887.47 ; R102.4@52099.85,49919.53 R102.2@52185.17,49912.53 ; R102.4@52100,49896.06 R102.2@52185.17,49887.47 ; R102.4@52100,49900 R102.2@52200,49900 U101.4@52290.23,49900 ; R102.4@52100,49903.94 R102.2@52185.17,49912.53 ; R102.4@52101.42,49884.47 52185.59,49900 R102.4@52101.42,49915.53 ; R102.4@52102.97,49888.63 R102.2@52185.17,49912.53 ; R102.4@52102.97,49911.37 R102.2@52185.17,49887.47 ; Sp1.1@52137.06,51166.36 52223.76,51223.51 Sp1.1@52166.61,51136.82 ; Sp1.1@52150.33,51150.09 52225,51224.76 52225,51535 52185,51575 v1(52185,52600) ; R102.2@52198.68,49885.06 52115,49900 R102.2@52198.68,49914.94 ; R102.2@52201.32,49885.06 52285,49900 R102.2@52201.32,49914.94 ; pad.164@52280.12,49802.22 52300,49890 pad.164@52319.88,49802.22 ; U101.4@52280.55,49901.75 pad.164@52282.24,49811.56 ; U101.4@52280.59,49897.87 52300,49810.47 U101.4@52319.41,49897.87 ; U101.4@52281.38,49894.11 pad.164@52317.76,49811.56 ; U101.4@52295.05,49881.11 R102.2@52210.97,49913.22 ; U101.4@52295.05,49918.89 R102.2@52210.97,49886.78 ; U101.4@52297.87,49880.59 R102.2@52210.47,49900 ; U101.4@52297.87,49919.41 R102.2@52210.47,49900 ; pad.164@52300,49800 U101.4@52300,49900 ; U101.4@52300.23,49900 52302.62,49897.62 52457.62,49897.62 52500,49940 52500,50180 ; U101.4@52300.76,49880.49 R102.2@52210.97,49886.78 ; U101.4@52300.76,49919.51 R102.2@52210.97,49913.22 ; U101.4@52301.61,49880.54 52389.6,49897.62 ; U101.4@52302.64,49919.35 52389.6,49897.62 ; U101.4@52318.62,49894.11 pad.164@52282.24,49811.56 ; U101.4@52319.45,49901.75 pad.164@52317.76,49811.56 ; v1(52340,52600) 52340,52865 52375,52900 ; U6-1.14@52430.59,52902.13 52450,52989.53 U6-1.14@52469.41,52902.13 ; U6-1.14@52447.46,52880.64 52375,52900 ; U6-1.14@52447.46,52919.36 52375,52900 ; R109.3@52480.47,50500.15 R109.1@52487.47,50414.83 ; pad.91@52484,53112 52450,53050 ; R109.3@52484.47,50498.58 52500,50414.41 R109.3@52515.53,50498.58 ; R109.1@52485.06,50398.68 52500,50315 R109.1@52514.94,50398.68 ; R109.1@52485.06,50401.32 52500,50485 R109.1@52514.94,50401.32 ; R109.3@52488.63,50497.03 R109.1@52512.53,50414.83 ; R109.3@52494.4,50512.33 52574.16,50564.16 ; R109.3@52495,50485 52650,50640 ; R109.3@52496.06,50500 R109.1@52487.47,50414.83 ; pad.91@52496.89,53080.24 C8.1@52594.42,53075 ; R109.3@52500,50500 R109.1@52500,50400 52500,50180 ; pad.91@52507.07,53118.71 C8.1@52594.42,53075 ; R109.3@52511.37,50497.03 R109.1@52487.47,50414.83 ; pad.91@52512,53084 52450,53050 ; R109.3@52515.36,50489.39 52574.16,50564.16 ; R109.3@52519.53,50500.15 R109.1@52512.53,50414.83 ; R109.3@52520,50500 R109.3@52520,50520 ; v1(52530,50180) 52500,50180 ; C8.1@52594.94,53114.12 pad.91@52507.98,53075 ; C8.1@52595.68,53114.36 pad.91@52506.52,53079.73 ; C8.1@52595.94,53085.56 pad.91@52508.78,53117.85 ; C8.1@52597.25,53085.25 52693.22,53075 ; C8.1@52598.56,53114.93 pad.91@52505.82,53098.46 ; C8.1@52599.05,53085.03 pad.91@52505.82,53098.46 ; C8.1@52601.68,53114.91 pad.91@52508.78,53117.85 ; C8.1@52602.02,53085.14 pad.91@52506.52,53079.73 ; C8.1@52602.78,53085.26 pad.91@52507.98,53075 ; C8.1@52605,53114.14 52693.22,53075 ; C103.1@52635.12,50698.12 52650,50640 ; C103.1@52635.66,50704.39 52675,50807.22 ; C104.2@52638.57,50904.25 52675,51006.31 ; C104.2@52638.79,50895.04 52675,50809.74 ; C103.1@52664.81,50697.6 52675,50807.22 ; C103.1@52664.88,50698.12 52650,50640 ; C104.2@52669.84,50902.27 52675,50809.74 ; C104.2@52669.88,50898.07 52675,51006.31 ; 52675,50725 52675,50925 52675,51075 C5.2@52700,51100 ; C5.2@52684.21,51098.61 52675,50993.69 ; C5.2@52700,51096 52675,50993.69 ; C5.2@52715.21,51091.03 52675,50993.69 ; C6.2@52784.12,53094.06 52800,53030 ; C6.2@52795.26,53111.28 52705.29,53075 ; C6.2@52800,53100 C6.2@52800,53075 ; C6.2@52802.16,53080.15 52705.29,53075 ; C6.2@52815.88,53094.06 52800,53030 ; C4.2@53034.07,51901.49 53050,51986 C4.2@53065.93,51901.49 ; U7.1@53035.06,52098.68 53050,52015 U7.1@53064.94,52098.68 ; U7.10@53048.68,52985.06 52965,53000 ; U7.10@53048.68,53014.94 52965,53000 ; C4.2@53050,51900 U7.1@53050,52100 ; Rp201.1@54195.58,53176.84 54303.57,53146.43 ; Rp201.1@54200,53200 54250,53200 ; Rp201.1@54219.31,53220.5 54303.57,53146.43 ; U202.3@54396.19,53080.85 54350,53100 ; U202.3@54396.19,53119.15 54350,53100 ; U202.3@54400,53100 54350,53100 ; pad.0@54780.12,52702.22 54800,52790 pad.0@54819.88,52702.22 ; U201.4@54780.59,52997.89 54800,52909.53 ; pad.0@54800,52700 54800,52970 54830,53000 54860,53000 ; U201.2@54800,53200 54860,53200 ; U201.4@54803.18,52980.73 54860,53000 ; U201.4@54803.18,53019.27 54860,53000 ; U201.2@54803.18,53180.73 54860,53200 ; U201.2@54803.18,53219.27 54860,53200 ; U201.4@54819.41,52997.89 54800,52909.53 ; C2.2@55130,51099.72 C3.2@55136.53,51185.46 ; C3.2@55130,51199.72 C11.2@55136.53,51285.46 ; C2.2@55134.07,51101.49 55150,51186 C2.2@55165.93,51101.49 ; C3.2@55134.07,51198.51 55150,51114 C3.2@55165.93,51198.51 ; C3.2@55134.07,51201.49 55150,51286 C3.2@55165.93,51201.49 ; C11.2@55134.07,51298.51 55150,51214 C11.2@55165.93,51298.51 ; C11.2@55134.07,51301.49 55150,51386 C11.2@55165.93,51301.49 ; C1.1@55135.06,51498.68 55150,51415 C1.1@55164.94,51498.68 ; v2@55135.1,51023.97 C2.2@55134.09,51098.28 ; v2@55135.08,51027.2 C2.2@55150,51100 ; v2@55135.75,51030.36 C2.2@55165.91,51098.28 ; C2.2@55138.33,51103.23 C3.2@55163.47,51185.46 ; C3.2@55138.33,51203.23 C11.2@55163.47,51285.46 ; C2.2@55146,51100 C3.2@55136.53,51185.46 ; C3.2@55146,51200 C11.2@55136.53,51285.46 ; C1.1@55150,51500 C11.2@55150,51300 C3.2@55150,51200 C2.2@55150,51100 ; C2.2@55154,51100 C3.2@55163.47,51185.46 ; C3.2@55154,51200 C11.2@55163.47,51285.46 ; C2.2@55161.67,51103.23 C3.2@55136.53,51185.46 ; C3.2@55161.67,51203.23 C11.2@55136.53,51285.46 ; v2@55164.25,51030.36 C2.2@55134.09,51098.28 ; v2@55164.9,51023.97 C2.2@55165.91,51098.28 ; v2@55164.92,51027.2 C2.2@55150,51100 ; C2.2@55170,51099.72 C3.2@55163.47,51185.46 ; C3.2@55170,51199.72 C11.2@55163.47,51285.46 ; C13.2@55384.07,51498.51 55400,51414 C13.2@55415.93,51498.51 ; C14.1@55385.06,51301.32 55400,51385 C14.1@55414.94,51301.32 ; C14.1@55400,51300 C13.2@55400,51500 55515,51500 55600,51585 ; C13.2@55404,51500 55490,51500 ; C13.2@55405.49,51484.07 55490,51500 ; C13.2@55405.49,51515.93 55490,51500 ; J5.3@55580.28,51641.67 55600,51585 ; J5.3@55600,51645 55600,51585 ; J5.3@55602.86,51630.21 55670,51650 ; J5.3@55602.86,51669.79 55670,51650 ; J5.3@55619.72,51641.67 55600,51585 ; R102.2@52210.47,49900 U101.4@52300,49900 ; R102.2@52210.97,49886.78 U101.4@52300,49900 ; R102.2@52210.97,49913.22 U101.4@52300,49900 ; pad.164@52282.24,49811.56 U101.4@52300,49900 ; U101.4@52300,49900 pad.164@52317.76,49811.56 ; U101.4@52300,49900 52389.6,49897.62 ; 52375,52900 U6-1.14@52450,52900 52450,53050 ; 52450,53050 pad.91@52500,53100 C8.1@52594.42,53075 ; 52450,53050 52475,53075 C6.2@52800,53075 ; pad.91@52505.82,53098.46 C8.1@52600,53100 ; pad.91@52506.52,53079.73 C8.1@52600,53100 ; pad.91@52507.98,53075 C8.1@52600,53100 ; pad.91@52508.78,53117.85 C8.1@52600,53100 ; R109.1@52512.53,50414.83 52503.94,50500 52574.16,50564.16 ; C8.1@52600,53100 52693.22,53075 ; 52650,50640 C103.1@52650,50700 ; 52650,50640 C103.1@52650,50700 ; C103.1@52650,50700 52675,50807.22 ; 52675,50809.74 52654,50900 52675,51006.31 ; 52705.29,53075 52800,53096 52800,53030 ; 52800,53030 C6.2@52800,53075 ; 52800,53030 52830,53000 U7.10@53050,53000 52965,53000 ; Rp201.1@54205,53200 54250,53200 ; Rp201.1@54205,53200 54303.57,53146.43 ; Rp201.1@54205,53200 54250,53200 ; 54250,53200 54211.94,53175.98 54250,53200 ; 54250,53200 54211.94,53224.02 54250,53200 ; 54250,53200 54350,53100 ; 54800,52909.53 U201.4@54800,53000 54860,53000 ; 54860,53000 54874.69,53014.69 54874.69,53185.31 54860,53200 ; C2.2@55134.09,51098.28 v2(55150,51025.69) ; v2(55150,51025.69) C2.2@55165.91,51098.28 ; v2(55150,51025.69) C2.2@55150,51100 ; 55600,51585 J5.3@55600,51650 55670,51650
  TopLayer w30: R9.1@54700,52550 R9.3@54800,52550 ; R8.3@55500,52375 R8.1@55600,52375
  TopLayer w50: pad.2@53200,49575 53200,51100 ; pad.2@53200,49600 pad.8@53200,49780 ; 53200,50892.03 U1.20@53250,51100 53200,51100 ; 53200,50892.76 U1-1.20@53150,51100 53200,51100 ; 53210,51000 pad.0@53850,51000 ; J4.4@55230,52075 pad.0@55500,52075 55650,52075 55675,52050 ; J3.4@55605,51100 55675,51140 ; 55635,51100 55675,51140 ; 55675,52175 55675,52050 ; 55675,51140 55675,52050
  BottomLayer w10: C205.2@52443.29,50923.9 52506.58,50934.15 ; C205.2@52445.68,50914.12 52506.58,50934.15 ; C205.2@52450,50900 52472.43,50900 52522.43,50950 52600,50950 C104.2@52650,50900 ; C205.2@52450,50904 52506.58,50934.15 ; C205.2@52455.99,50894.77 52506.58,50934.15 ; C205.2@52462.78,50887.34 52506.58,50934.15 ; C104.2@52628.39,50888.55 52602.79,50947.21 ; C104.2@52637.28,50893.3 52602.79,50947.21 ; C104.2@52646,50900 52602.79,50947.21 ; C104.2@52653.45,50908.1 52602.79,50947.21 ; C104.2@52658.96,50916.53 52602.79,50947.21 ; pad.1@52925.01,50919.36 U203.2@52939.07,50858.62 ; pad.1@52926.77,50910.77 U203.2@52960.93,50858.62 ; pad.1@52935.02,50920.83 U203.2@52939.07,50858.62 ; U203.2@52935.48,50846.86 pad.1@52950,50894.37 ; pad.1@52935.66,50915.61 U203.2@52960.93,50858.62 ; U203.2@52950,50825 pad.1@52950,50920 ; U203.2@52950,50844.69 pad.1@52950,50894.37 ; pad.1@52964.34,50915.61 U203.2@52939.07,50858.62 ; U203.2@52964.52,50846.86 pad.1@52950,50894.37 ; pad.1@52964.98,50920.83 U203.2@52960.93,50858.62 ; pad.1@52973.23,50910.77 U203.2@52939.07,50858.62 ; pad.1@52974.99,50919.36 U203.2@52960.93,50858.62 ; U202.4@54376,53005.05 54400,53059.53 ; U202.3@54376,53094.95 54400,53040.47 ; U202.4@54385.58,53001.77 54400,53059.53 ; U202.3@54385.58,53098.23 54400,53040.47 ; U202.4@54400,53000 U202.3@54400,53100 54425,53125 54475,53125 U202.13@54575,53225 ; U202.4@54414.42,53001.77 54400,53059.53 ; U202.3@54414.42,53098.23 54400,53040.47 ; U202.4@54424,53005.05 54400,53059.53 ; U202.3@54424,53094.95 54400,53040.47 ; U202.13@54569.38,53236.17 54538.02,53188.02 ; U202.13@54575,53232 54538.02,53188.02 ; U202.13@54575,53260 U202.14@54625,53260 ; U202.13@54575.58,53253.02 54617,53260 U202.13@54575.58,53266.98 ; U202.13@54580.07,53227.18 54538.02,53188.02 ; U202.14@54623.48,53253.17 U202.13@54583.13,53265.7 ; U202.14@54623.48,53266.83 U202.13@54583.13,53254.3 ; U202.14@54624.42,53253.02 54583,53260 U202.14@54624.42,53266.98 ; U202.14@54625.37,53253.01 U202.13@54583.13,53254.3 ; U202.14@54625.37,53266.99 U202.13@54583.13,53265.7 ; U201.4@54786.83,53020.69 54840,53040 ; U201.4@54791.13,53011.51 54840,53040 ; U201.4@54800,53000 54840,53040 ; U201.4@54811.51,52991.13 54840,53040 ; U201.4@54820.69,52986.83 54840,53040 ; U201.14@55018.36,53231.64 54888.36,53101.64 54871.64,53101.64 54840,53070 54840,53040 ; U201.14@55025,53235 U201.14@55025,53260 ; U203.2@52939.07,50858.62 pad.1@52950,50920 ; U203.2@52950,50860 52935.12,50918.12 U203.2@52950,50860 ; U203.2@52950,50860 52964.88,50918.12 U203.2@52950,50860 ; U203.2@52950,50860 52925.55,50914.79 U203.2@52950,50860 ; U203.2@52950,50860 52974.45,50914.79 U203.2@52950,50860 ; U203.2@52950,50860 pad.1@52950,50920 ; pad.1@52950,50920 U203.2@52960.93,50858.62 ; U202.13@54583.13,53254.3 U202.14@54625,53260 ; U202.13@54583.13,53265.7 U202.14@54625,53260
  BottomLayer w20: v1(52185,52600) v1(52340,52600) 52261,52600 ; C103.1@52635.17,50702.25 52650,50750 ; C103.1@52650,50700 52650,50750 ; C103.1@52664.83,50702.25 52650,50750 ; C206.2@52883.29,50690.28 52840,50760 ; C206.2@52893.58,50712.14 52950,50750 ; C206.2@52896,50700 52840,50760 ; C206.2@52904,50700 52950,50750 ; C206.2@52906.58,50712.01 52840,50760 ; C206.2@52916.97,50690.63 52950,50750 ; U203.2@52950,50805.31 52950,50750 ; U203.2@52950,50825 52950,50750 ; U1-1.20@53150,51100 U1.20@53250,51100 ; U1-1.20@53152.13,51080.59 53239.53,51100 U1-1.20@53152.13,51119.41 ; U1.20@53243.62,51079.99 U1-1.20@53160.04,51117.65 ; U1.20@53243.62,51120.01 U1-1.20@53160.04,51082.35 ; U1.20@53247.58,51079.14 53159,51100 U1.20@53247.58,51120.86 ; U1.20@53251.66,51079.07 U1-1.20@53160.04,51082.35 ; U1.20@53251.66,51120.93 U1-1.20@53160.04,51117.65 ; C209.2@54234.07,52155.49 C208.2@54250,52240 ; C208.2@54234.05,52247.29 C209.2@54235.06,52160.77 ; C208.2@54234.56,52241.79 C209.2@54264.94,52160.77 ; C209.2@54250,52150 C208.2@54250,52250 ; C209.2@54250,52154 C208.2@54250,52240 ; C208.2@54265.44,52241.79 C209.2@54235.06,52160.77 ; C209.2@54265.93,52155.49 C208.2@54250,52240 ; C208.2@54265.95,52247.29 C209.2@54264.94,52160.77 ; 54500,51030.69 v1(54500,51330) ; U201.2@54800,53200 54910,53200 ; U201.12@54925,53260 54925,53215 ; 55275,52425 55510,52425 ; 55500,52450 55500,52700 ; J200.1@55570.69,52674.94 55500,52700 ; J200.1@55570.69,52725.06 55500,52700 ; J200.1@55575,52700 55500,52700 ; J202.3@55630.21,53092.14 55650,53025 ; J202.3@55650,53095 55650,53025 ; J202.3@55650,53100 55650,53025 ; J202.3@55669.79,53092.14 55650,53025 ; 52650,50750 52660,50760 52840,50760 ; 52840,50760 C206.2@52900,50700 52950,50750 ; U1-1.20@53160.04,51082.35 U1.20@53250,51100 ; U1-1.20@53160.04,51117.65 U1.20@53250,51100 ; C209.2@54235.06,52160.77 C208.2@54250,52246 ; C209.2@54250,52160 C208.2@54250,52246 ; C209.2@54250,52160 54234.07,52244.51 C209.2@54250,52160 ; C209.2@54250,52160 54265.93,52244.51 C209.2@54250,52160 ; C209.2@54250,52160 C208.2@54250,52246 ; C208.2@54250,52246 C209.2@54264.94,52160.77 ; 54910,53200 U201.12@54925,53232 ; 54910,53200 54925,53215 ; 54925,53215 U201.12@54925,53232 ; 54925,53215 U201.12@54925,53232 ; 55500,52700 J200.1B@55575,52682.28 ; 55500,52700 J200.1@55576.95,52695.77 ; 55500,52700 J200.1@55570.71,52669.35 ; 55500,52700 J200.1B@55575,52682.28 ; 55500,52700 J200.1@55576.95,52695.77 ; 55500,52700 J200.1@55570.71,52669.35 ; 55500,52700 J200.1B@55575,52682.28 ; 55500,52700 J200.1@55576.95,52695.77 ; 55500,52700 J200.1@55570.71,52669.35 ; 55500,52700 J200.1B@55575,52682.28 ; 55500,52700 J200.1@55576.95,52695.77 ; 55500,52700 J200.1@55570.71,52669.35 ; 55500,52700 J200.1A@55575,52717.72 55500,52700 ; 55500,52700 55570.71,52730.64 55500,52700 ; 55500,52700 55576.95,52704.23 55500,52700 ; 55500,52700 55500,52975 55525,53000 55625,53000 55650,53025
  BottomLayer w30: C208.2@54250,52250 54300,52300 ; C208.2@54250,52254 54300,52300 ; J201.3@54300,52545 54301,52424.99 ; J201.3@54300,52555 54300,52675 ; U202.4@54400,53000 54330,53000 54300,52970 54300,52700 ; R9.1@54700,52550 54700,52690 ; pad.0@54825,52700 pad.0@54800,52700 ; 55275,52425 55200,52500 C210.2@55200,52550 55200,52675 ; pad.0@55500,52075 55500,52380 ; 55500,52450 55500,52380 ; 54300,52300 54300,52307.64 54301,52308.64 54301,52549 J201.3@54300,52550 54300,52700 ; 54300,52700 C204.1@54400,52700 C211.1@54650,52700 pad.0@54800,52700 ; pad.0@54800,52700 C203.1@54900,52700 C212.1@55150,52700 ; C212.1@55150,52700 55200,52675 ; C212.1@55150,52700 55175,52700 55200,52675 ; 55500,52380 R8.1@55600,52375 55595,52380 55500,52380
  BottomLayer w50: C7.2@51850,51350 51950,51350 52000,51300 52000,51200 52050,51150 ; 52100,49575 pad.156@53000,49575 ; 52278.06,51150.09 D4.2@52460.08,51139.92 52500,51100 ; D4.2@52449.91,51150.09 Sp1.1@52150.33,51150.09 ; D4.2@52450,51150 52500,51100 ; 52511.74,49575 pad.159@52700,49600 ; pad.157@52887.5,49575 pad.159@52700,49600 ; pad.157@52891.05,49598.81 pad.159@52700,49600 ; pad.156@52986.76,49575 pad.158@52800,49600 ; pad.156@52991.02,49598.81 pad.158@52800,49600 ; U1-1.20@53150,51100 C10.1@52900,51100 C5.2@52700,51100 52500,51100 ; pad.2@53186.76,49575 pad.156@53000,49600 ; pad.2@53191.74,49598.89 pad.156@53000,49600 ; 53386.96,49575 pad.2@53200,49600 ; pad.0@53825,51000 pad.0@53850,51000 54100,51000 55176,51000 ; 54965.59,51000 v2(55150,51025.69) 55337.46,51000 ; 55150,51000 55525.69,51000 ; J3.4@55595,51100 55525.69,51025.69 J3.4@55600,51100 ; 52050,51150 Sp1.1@52150.33,51150.09 ; 52050,51150 52150.24,51150 Sp1.1@52150.33,51150.09 ; pad.159@52700,49600 52611.63,49575 pad.158@52800,49600 ; pad.159@52700,49600 pad.158@52800,49600 ; pad.159@52700,49600 pad.158@52800,49600 ; pad.158@52800,49600 52711.54,49575 pad.157@52900,49600 ; pad.158@52800,49600 pad.157@52900,49600 ; pad.158@52800,49600 pad.157@52900,49600 ; pad.157@52900,49600 pad.156@53000,49575 ; pad.157@52900,49600 52811.48,49575 pad.156@53000,49600 ; pad.157@52900,49600 pad.156@53000,49600 ; pad.156@53000,49575 pad.155@53100,49600 ; pad.156@53000,49575 pad.2@53200,49575 ; pad.156@53000,49600 pad.155@53100,49600 ; pad.156@53000,49600 pad.155@53100,49600 ; pad.155@53100,49600 53013.24,49575 pad.2@53200,49600 ; pad.155@53100,49600 pad.2@53200,49600 ; pad.155@53100,49600 pad.2@53200,49575 ; pad.2@53200,49575 pad.10@53300,49600 ; pad.2@53200,49575 53420,49575 ; pad.2@53200,49600 pad.10@53300,49600 ; pad.10@53300,49600 53420,49575 ; 53420,49575 53475,49630 53475,49865 53510,49900 ; 53510,49900 U2.15@53600,49900 53510,49900